# Altium PCB Arduino_DIY_V1.0.PcbDoc (part 2 of 3)
Units mil, origin at the board's own origin, x right, y up, seen from the top; angles counter-clockwise.
Board outline 4035.9 x 4932.05 mil, 2 copper layers (Top Layer, Bottom Layer), stack 46.063 mil thick; 122 components, 93 nets, 431 pads, 264 vias.
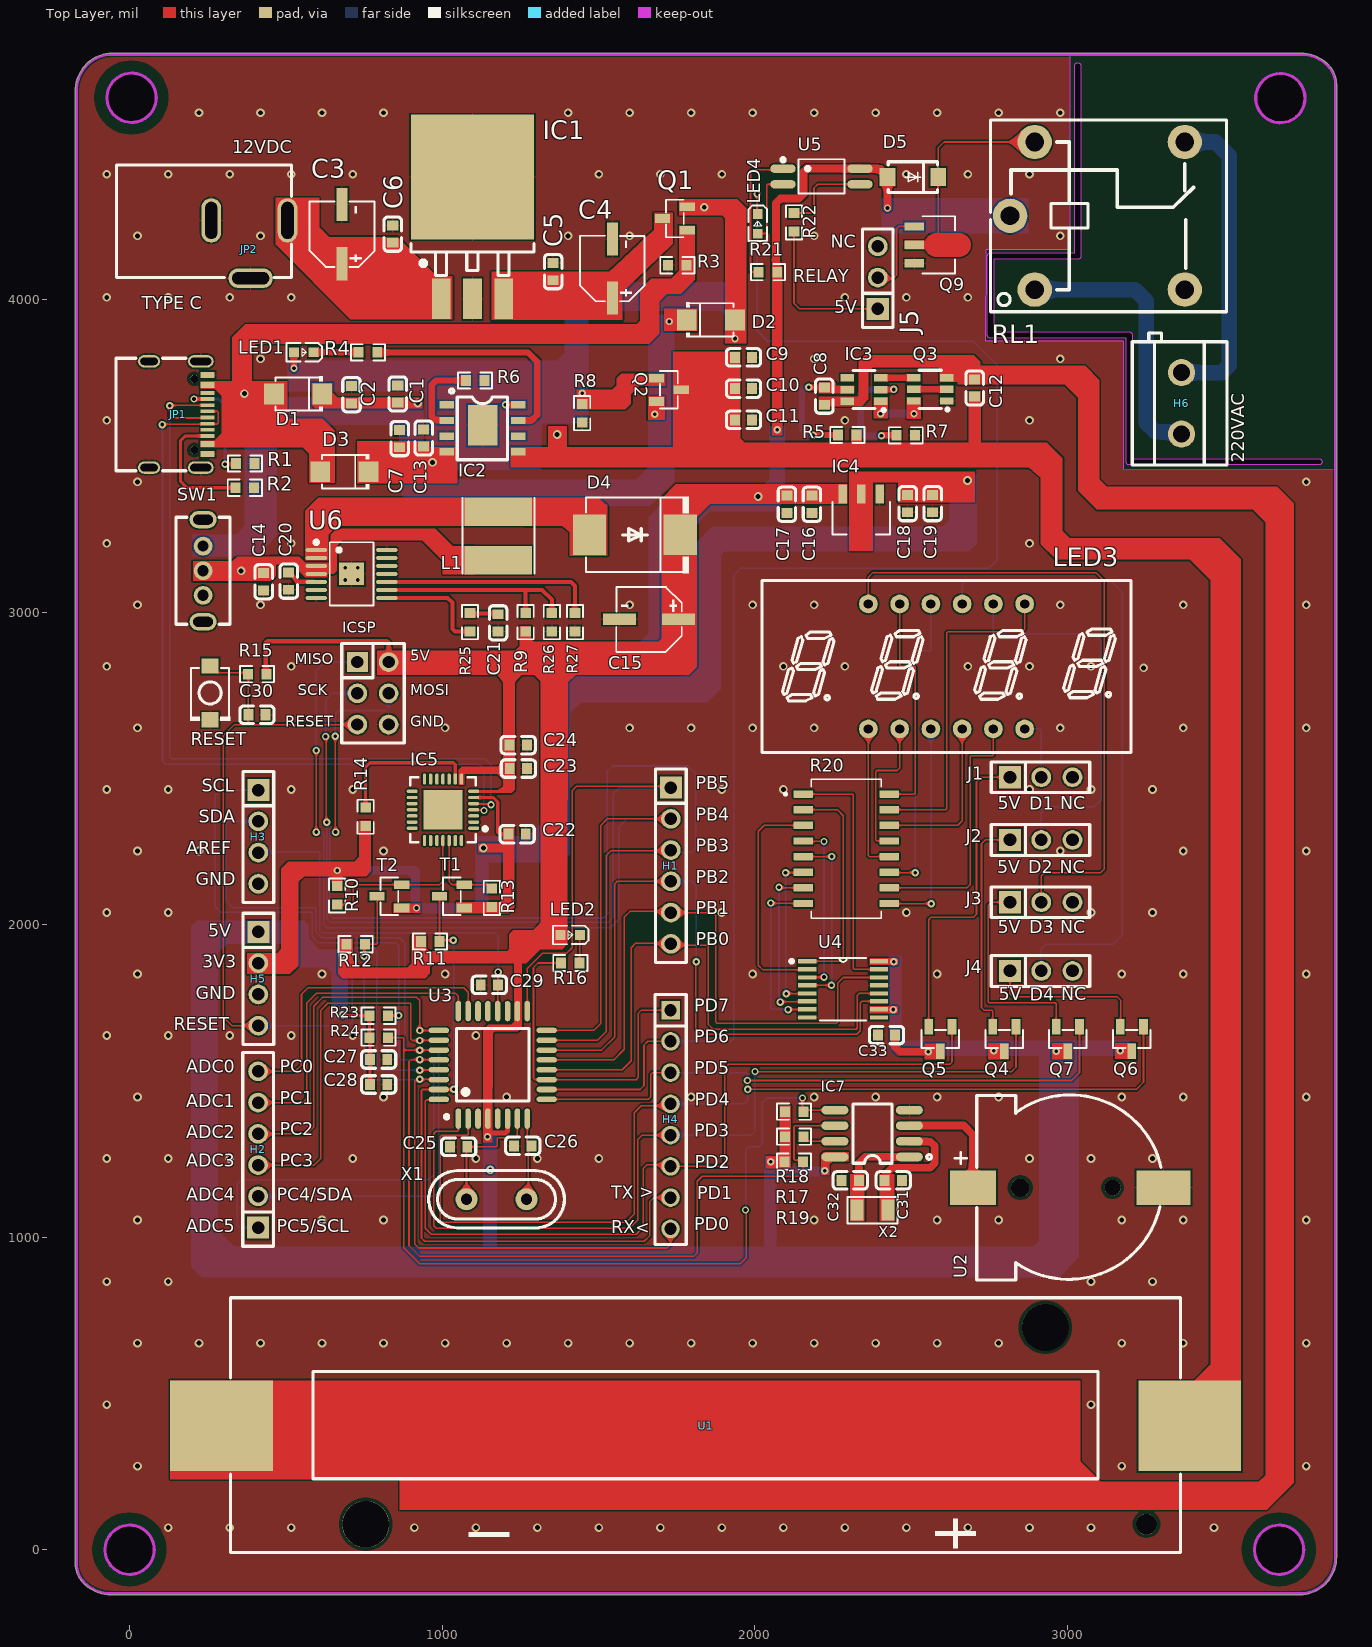
[diagram p0: Top Layer view]

## Via types
v1: diameter 27.56, hole 15.75, Top Layer to Bottom Layer, tented both sides, 182 vias
v2: diameter 23.62, hole 11.81, Top Layer to Bottom Layer, tented both sides, 69 vias
v3: diameter 27.56, hole 15.75, Top Layer to Bottom Layer, tented top, 9 vias
v4: diameter 24, hole 12, Top Layer to Bottom Layer, tented both sides, 4 vias

## Nets (pads, with @x,y where several pads share a name; then routed paths per layer and width w, separated by ;. In a path a pad name is that pad's centre, name@x,y a point inside that pad or via, vN(x,y) a via of type N, cw(c..) or ccw(c..) an arc to the next point about the centre after c; other vN are vias at no path point) (continued)
+5V: (continued)
  Bottom Layer w10: v2(682.15,1711.49) 682.15,1900.49 v2(680.15,1902.49) 564.15,1902.49 555.15,1911.49 555.15,1960.49 536.15,1979.49 414.42,1979.49 H5.1@411.93,1977.01 261.67,1977.01 227.15,1942.49 227.15,937.35 233.01,931.49 1159.15,931.49 ; ICSP.6@828.87,2840.49 1638.74,2840.49 1725.15,2926.9 1725.15,3286.49 1809.15,3370.49 v3(2011.15,3370.49) 2057.15,3370.49 2072.46,3385.8 v2(2072.46,3583.8) ; v2(1145.15,1321.49) 1145.15,1317.81 1154.15,1308.81 1154.15,936.49 1159.15,931.49 ; v2(2052.15,1241.49) 2052.15,1212.49 ; v2(2224.15,1212.49) 2052.15,1212.49 ; v2(2445.15,1881.49) 2444.65,1880.99 2444.65,1728.99 v2(2444.15,1728.49) 2444.15,1602.49 2453.15,1593.49 v2(2556.15,1593.49) 2557.65,1594.99 2763.65,1594.99 v2(2765.15,1596.49) ; v2(2965.15,1595.49) 2965.15,986.49 2910.15,931.49 2023.15,931.49 ; 1159.15,931.49 2023.15,931.49 ; 2023.15,931.49 2052.15,960.49 2052.15,1212.49
  Bottom Layer w25: v2(2425.15,4293.49) 2450.15,4268.49 RL1.5@2817.62,4268.49
  other v3: 1154.15,1215.49
+5V_B: D1.2 D3.2 JP1.A9B4 JP1.B9A4 Q1.1 R3.2 TP1.1 | length 2059.9
  Top Layer w20: JP1.A9B4@249.97,3538.36 250.13,3538.51 274.1,3538.51 324.41,3588.82 324.41,3676.91 274.14,3727.18 250.13,3727.18 JP1.B9A4@249.97,3727.33 ; v3(367.15,3699.49) 367.15,3871.49 385.15,3889.49 1646.43,3889.49 1658.15,3901.21 1658.15,4025.49 1678.15,4045.49 1755.15,4045.49 1782.46,4072.8 R3.2@1782.46,4110.49
ADC0: H2.6 U3.23 | length 981.8
  Top Layer w5: H2.6@411.15,1530.85 529.5,1530.85 550.15,1551.49 550.15,1777.49 570.68,1798.03 1069.61,1798.03 1083.41,1784.23 U3.23@1083.41,1723.49
ADC1: H2.5 U3.24 | length 1016.7
  Top Layer w5: H2.5@411.15,1430.85 554.5,1430.85 567.15,1443.49 567.15,1749.49 598.15,1780.49 1043.15,1780.49 1051.91,1771.73 U3.24@1051.91,1723.49
ADC2: H2.4 U3.25 | length 1086.1
  Top Layer w5: H2.4@411.15,1330.85 566.5,1330.85 589.15,1353.49 589.15,1739.49 617.15,1767.49 919.15,1767.49 928.15,1758.49 v2(928.15,1661.49) ; v2@928.27,1661.61 989.53,1661.61 U3.25@989.65,1661.73
ADC3: H2.3 U3.26 | length 1181.6
  Top Layer w5: H2.3@411.15,1230.85 590.5,1230.85 612.15,1252.49 612.15,1726.49 634.15,1748.49 897.22,1748.49 900.15,1745.56 900.15,1633.87 904.52,1629.49 v2(928.15,1629.49) ; v2@932.15,1629.49 932.52,1629.86 989.28,1629.86 U3.26@989.65,1630.23
AREF: C29.2 H3.3 U3.20 | length 1267.8
  Top Layer w5: U3.20@1177.9,1723.49 1178.3,1723.9 1178.3,1807.09 1179.15,1807.94 v2(1179.15,1848.49)
  Bottom Layer w5: H3.3@411.93,2230.85 414.65,2233.56 606.15,2233.56 609.08,2230.64 609.08,1981.56 616.15,1974.49 1170.15,1974.49 1179.15,1965.49 v2(1179.15,1848.49)
DATA+: IC5.4 JP1.A6 JP1.B6 | length 2550.9
  Top Layer w5: v2(104.15,3600.49) 105.56,3601.9 248.56,3601.9 249.99,3601.92 269.91,3602.2 278.41,3602.2 ccw(c278.41,3607.2) 283.41,3607.2 283.41,3638.25 ccw(c278.41,3638.25) 278.41,3643.25 269.91,3643.25 JP1.A6@249.97,3642.69 JP1.A6@230.03,3641.25 ; IC5.4@1101.15,2367.79 1102.3,2366.64 1132.88,2366.64 v2(1134.19,2365.33)
  Bottom Layer w5: v2(104.15,3600.49) 105.22,3599.42 105.22,2530.42 ccw(c122.15,2530.42) 122.15,2513.49 1110.15,2513.49 cw(c1110.15,2490.84) 1132.8,2490.84 1132.8,2366.72 v2(1134.19,2365.33)
DATA-: IC5.5 JP1.A7 JP1.B7 | length 2628.2
  Top Layer w5: JP1.A7@249.97,3623.01 230.03,3621.5 133.15,3621.5 cw(c133.15,3626.51) 128.15,3626.5 v2(128.15,3660.49) 130.03,3662.38 JP1.B7@249.97,3662.38 ; IC5.5@1101.15,2387.49 1102.24,2386.4 1153.39,2386.4 v2(1156.34,2383.46)
  Bottom Layer w5: v2(128.15,3660.49) 128.15,2543.49 ccw(c141.15,2543.49) 141.15,2530.49 1129.15,2530.49 1139.92,2530.49 1156.34,2514.07 v2(1156.34,2383.46)
DIG1: H4.6 Q5.1 U3.32 | length 2783.5
  Top Layer w5: U3.32@989.65,1441.26 987.21,1438.82 949.08,1438.82 946.15,1435.9 946.15,1028.49 965.15,1009.49 1621.15,1009.49 1643.15,1031.49 1643.15,1219.49 1655.15,1231.49 1726.39,1231.49 H4.6@1731.15,1226.73 1900.94,1226.73 1903.87,1229.66 1903.87,1539.87 1917.49,1553.49 2624.15,1553.49 2631.71,1561.05 Q5.1@2631.71,1673.8
DIG2: H4.5 Q4.1 U3.1 | length 2889.3
  Top Layer w5: U3.1@1051.91,1379.49 1051.91,1342.42 1048.98,1339.49 981.15,1339.49 973.15,1331.49 973.15,1036.49 981.15,1028.49 1599.15,1028.49 1626.15,1055.49 1626.15,1312.49 1640.39,1326.73 H4.5@1731.15,1326.73 ; v2(2001.15,1530.49) 2002.64,1529 2821,1529 2836.4,1544.4 Q4.1@2836.4,1673.8
  Bottom Layer w5: H4.5@1731.15,1326.73 1989.39,1326.73 2001.15,1338.49 v2(2001.15,1530.49)
DIG3: H4.4 Q6.1 U3.2 | length 3239.8
  Top Layer w5: U3.2@1083.41,1379.49 1083.41,1328.42 1080.48,1325.49 997.08,1325.49 994.15,1322.56 994.15,1050.42 997.08,1047.49 1588.15,1047.49 1615.15,1074.49 1615.15,1398.49 1637.15,1420.49 1724.91,1420.49 H4.4@1731.15,1426.73 ; v2(1978,1473) 3221,1473 3244.4,1496.4 Q6.1@3244.4,1673.8
  Bottom Layer w5: H4.4@1731.15,1426.73 1966.39,1426.73 1978,1438.35 v2(1978,1473)
DIG4: H4.3 Q7.1 U3.9 | length 1961.1
  Top Layer w5: U3.9@1334.65,1441.26 1659.91,1441.26 1667,1448.35 1667,1520 1673.73,1526.73 H4.3@1731.15,1526.73 ; v2(1976.98,1501.6) 3014.6,1501.6 3039.71,1526.71 Q7.1@3039.71,1673.8
  Bottom Layer w5: H4.3@1731.15,1526.73 1970.27,1526.73 1976.98,1520.02 v2(1976.98,1501.6)
DS: H1.5 U3.13 U4.14 | length 1990.3
  Top Layer w5: U3.13@1334.65,1567.24 1548.9,1567.24 1583.15,1601.49 1583.15,2024.49 1601.15,2042.49 1728.29,2042.49 H1.5@1731.94,2038.85 1865.8,2038.85 1876.15,2028.49 1876.15,1687.42 1879.08,1684.49 2262.15,1684.49 2265.46,1687.8 2265.46,1812.8 2283.71,1831.06 U4.14@2398.31,1831.06